# EAGLE board CT_schematic (EAGLE 7.6.0)

Size 100 x 80 mm. Coordinates in mm from the lower left corner, seen from the top.
Outline: 0,0 100,0 100,80 0,80 0,0
Copper layers (1*16): Top 0.035mm / dielectric 1.5mm / Bottom 0.035mm
Design rules "default": minimum track width 10mil, minimum drill 24mil, track to track 8mil, track to pad 8mil, pad to pad 8mil, via to via 8mil, smd to smd 8mil, copper to edge 40mil, drill to drill 8mil, minimum pad ring 10mil, minimum via ring 8mil, stop-mask expansion 4mil, vias tented up to drill 0mil, thermal gap 10mil

## Footprints (pad centres in the part's own frame; a part is rotated, then mirrored left to right if it is on the bottom)
C0603 = smd 0.8 x 0.8: 1 -0.762,0; 2 0.762,0
C0402 = smd 0.5 x 0.5: 1 -0.508,0; 2 0.508,0
C1206 = smd 1.3 x 1.6: 1 -1.524,0; 2 1.524,0
C0805 = smd 1.2 x 1.3: 1 -1.016,0; 2 1.016,0
C1210 = smd 1.2 x 2.5: 1 -1.524,0; 2 1.524,0
EXV-9H = smd 3.505 x 1.676: 1 -2.857,0; 2 2.857,0
PJ-037B_PACKAGE = drill 3.7 square: 1 12,0 | drill 3.2 square: 2 6,0
R0603 = smd 0.8 x 0.8: 1 -0.762,0; 2 0.762,0
LQFP64 = smd 0.3 x 1.2: 1 -3.75,-5.75; 2 -3.25,-5.75; 3 -2.75,-5.75; 4 -2.25,-5.75; 5 -1.75,-5.75; 6 -1.25,-5.75; 7 -0.75,-5.75; 8 -0.25,-5.75; 9 0.25,-5.75; 10 0.75,-5.75; 11 1.25,-5.75; 12 1.75,-5.75; 13 2.25,-5.75; 14 2.75,-5.75; 15 3.25,-5.75; 16 3.75,-5.75; 33 3.75,5.75; 34 3.25,5.75; 35 2.75,5.75; 36 2.25,5.75; 37 1.75,5.75; 38 1.25,5.75; 39 0.75,5.75; 40 0.25,5.75; 41 -0.25,5.75; 42 -0.75,5.75; 43 -1.25,5.75; 44 -1.75,5.75; 45 -2.25,5.75; 46 -2.75,5.75; 47 -3.25,5.75; 48 -3.75,5.75 | smd 1.2 x 0.3: 17 5.75,-3.75; 18 5.75,-3.25; 19 5.75,-2.75; 20 5.75,-2.25; 21 5.75,-1.75; 22 5.75,-1.25; 23 5.75,-0.75; 24 5.75,-0.25; 25 5.75,0.25; 26 5.75,0.75; 27 5.75,1.25; 28 5.75,1.75; 29 5.75,2.25; 30 5.75,2.75; 31 5.75,3.25; 32 5.75,3.75; 49 -5.75,3.75; 50 -5.75,3.25; 51 -5.75,2.75; 52 -5.75,2.25; 53 -5.75,1.75; 54 -5.75,1.25; 55 -5.75,0.75; 56 -5.75,0.25; 57 -5.75,-0.25; 58 -5.75,-0.75; 59 -5.75,-1.25; 60 -5.75,-1.75; 61 -5.75,-2.25; 62 -5.75,-2.75; 63 -5.75,-3.25; 64 -5.75,-3.75
SAMTEC_FTSH-105-01-L-DV-K = smd 0.762 x 2.794: 1 -2.54,-2.032; 2 -2.54,2.032; 3 -1.27,-2.032; 4 -1.27,2.032; 5 0,-2.032; 6 0,2.032; 7 1.27,-2.032; 8 1.27,2.032; 9 2.54,-2.032; 10 2.54,2.032
AT24C02D = smd 1.6 x 0.6: 1 -2.475,1.905 | smd 1.55 x 0.6: 2 -2.475,0.635; 3 -2.475,-0.635; 4 -2.475,-1.905; 5 2.475,-1.905; 6 2.475,-0.635; 7 2.475,0.635; 8 2.475,1.905
QFN-32 = smd 0.6 x 0.3: 1 -2.3,1.75; 2 -2.3,1.25; 3 -2.3,0.75; 4 -2.3,0.25; 5 -2.3,-0.25; 6 -2.3,-0.75; 7 -2.3,-1.25; 8 -2.3,-1.75; 17 2.3,-1.75; 18 2.3,-1.25; 19 2.3,-0.75; 20 2.3,-0.25; 21 2.3,0.25; 22 2.3,0.75; 23 2.3,1.25; 24 2.3,1.75 | smd 0.3 x 0.6: 9 -1.75,-2.3; 10 -1.25,-2.3; 11 -0.75,-2.3; 12 -0.25,-2.3; 13 0.25,-2.3; 14 0.75,-2.3; 15 1.25,-2.3; 16 1.75,-2.3; 25 1.75,2.3; 26 1.25,2.3; 27 0.75,2.3; 28 0.25,2.3; 29 -0.25,2.3; 30 -0.75,2.3; 31 -1.25,2.3; 32 -1.75,2.3 | smd 3.2 x 3.2: EXP 0,0
SJ-43515TS-SMT-TR = smd 2.2 x 3: 1 0.6,-7.4; 4 3.4,-7.4 | smd 3 x 3: 2 12.8,-7.4; 5 17,-3 | smd 2 x 3: 3 5.3,0; 6 2.5,0 | drill 1.8: P$7 4.5,-3.69; P$8 11.54,-3.69
WM-64PC = drill 0.6 pad 1: 1 -1,0.95; 2 -1,-0.95
ABLS-25.000MHZ-B2F-T = smd 5.6 x 2.8: 1 -3.81,0; 2 5.69,0
ASEK = smd 1.4 x 1: 1 -1.1,-0.8; 2 1.1,-0.8; 3 1.1,0.8; 4 -1.1,0.8
ASFL1 = smd 1.7 x 1.5: 1 -1.27,-1.1; 2 1.27,-1.1; 3 1.27,1.1; 4 -1.27,1.1
WSON-8 = smd 0.3 x 0.6: 1 -0.75,0; 2 0.05,0; 3 0.85,0; 4 1.65,0; 5 1.65,3.8; 6 0.85,3.8; 7 0.05,3.8; 8 -0.75,3.8 | smd 3 x 2.6: PAD 0.45,1.9
SON-6 = smd 0.55 x 0.3: 1 -0.355,0.5 | smd 0.52 x 0.3: 2 -0.37,0; 3 -0.37,-0.5; 4 0.37,-0.5; 5 0.37,0; 6 0.37,0.5
SW_4-1437565-2 = smd 1.4 x 2.1: 1 -2.23,4.55; 2 -2.23,-4.55; 3 2.23,4.55; 4 2.23,-4.55
LGM67K-G1J2-24-Z = smd 0.8 x 1.4: A -2,0; C 0,0
NC7SZ125M5X = smd 1.3 x 0.7: 1 -1.3,0.95; 2 -1.3,0; 3 -1.3,-0.95; 4 1.3,-0.95; 5 1.3,0.95

## Placement (x,y rotation side)
C1  1e-06  [C0603]  -33.02,77.47 0 top  (outside the outline)
C2  1e-07  [C0603]  -36.83,77.47 0 top  (outside the outline)
C3  1e-07  [C0603]  -40.64,77.47 0 top  (outside the outline)
C4  1e-07  [C0603]  -44.45,77.47 0 top  (outside the outline)
C5  1e-07  [C0603]  -48.26,77.47 0 top  (outside the outline)
C6  1e-07  [C0603]  -52.07,77.47 0 top  (outside the outline)
C7  4.7e-06  [C0603]  -29.21,77.47 0 top  (outside the outline)
C8  1e-08  [C0603]  -55.88,77.47 0 top  (outside the outline)
C9  1e-06  [C0603]  -59.69,77.47 0 top  (outside the outline)
C10  1e-07  [C0603]  -63.5,77.47 0 top  (outside the outline)
C11  1e-11  [C0402]  -80.01,82.55 0 top  (outside the outline)
C12  1e-11  [C0402]  -83.82,82.55 0 top  (outside the outline)
C13  1e-07  [C0402]  -15.24,87.63 0 top  (outside the outline)
C14  1e-08  [C0402]  -19.05,87.63 0 top  (outside the outline)
C15  1e-08  [C0402]  -22.86,87.63 0 top  (outside the outline)
C16  1e-06  [C0603]  -67.31,77.47 0 top  (outside the outline)
C17  1e-06  [C0603]  -71.12,77.47 0 top  (outside the outline)
C18  1e-06  [C0603]  -74.93,77.47 0 top  (outside the outline)
C19  1e-06  [C0603]  -78.74,77.47 0 top  (outside the outline)
C20  1e-06  [C0603]  -82.55,77.47 0 top  (outside the outline)
C21  1e-06  [C0603]  -15.24,82.55 0 top  (outside the outline)
C22  1e-06  [C0603]  -19.05,82.55 0 top  (outside the outline)
C23  1e-07  [C0402]  -26.67,87.63 0 top  (outside the outline)
C24  1e-07  [C0402]  -30.48,87.63 0 top  (outside the outline)
C25  1e-07  [C0402]  -34.29,87.63 0 top  (outside the outline)
C26  1e-07  [C0402]  -38.1,87.63 0 top  (outside the outline)
C27  1e-06  [C0603]  -22.86,82.55 0 top  (outside the outline)
C28  1e-08  [C0402]  -41.91,87.63 0 top  (outside the outline)
C29  1e-08  [C0402]  -45.72,87.63 0 top  (outside the outline)
C30  1e-08  [C0402]  -49.53,87.63 0 top  (outside the outline)
C31  1e-05  [C1206]  -55.88,64.77 0 top  (outside the outline)
C32  1e-05  [C0805]  -80.01,64.77 0 top  (outside the outline)
C33  1e-08  [C0402]  -53.34,87.63 0 top  (outside the outline)
C34  1e-05  [C1206]  -62.23,64.77 0 top  (outside the outline)
C35  1e-05  [C1210]  -49.53,64.77 0 top  (outside the outline)
C36  1e-07  [C0402]  -57.15,87.63 0 top  (outside the outline)
C37  0.0001  [EXV-9H]  -57.15,55.88 0 top  (outside the outline)
C38  0.0001  [EXV-9H]  -68.58,55.88 0 top  (outside the outline)
C39  1e-08  [C0402]  -60.96,87.63 0 top  (outside the outline)
C40  1e-08  [C0402]  -64.77,87.63 0 top  (outside the outline)
J1  PJ-037B  [PJ-037B_PACKAGE]  -83.82,21.59 0 top  (outside the outline)
R2  1000.0  [R0603]  -26.67,82.55 0 top  (outside the outline)
R4  4700.0  [R0603]  -30.48,82.55 0 top  (outside the outline)
R5  2200.0  [R0603]  -34.29,82.55 0 top  (outside the outline)
R6  2200.0  [R0603]  -38.1,82.55 0 top  (outside the outline)
R7  2200.0  [R0603]  -41.91,82.55 0 top  (outside the outline)
R8  2200.0  [R0603]  -45.72,82.55 0 top  (outside the outline)
R9  10000.0  [R0603]  -30.48,72.39 0 top  (outside the outline)
R10  10000.0  [R0603]  -35.56,72.39 0 top  (outside the outline)
R11  10000.0  [R0603]  -40.64,72.39 0 top  (outside the outline)
R12  10000.0  [R0603]  -45.72,72.39 0 top  (outside the outline)
R13  5.0  [R0603]  -49.53,82.55 0 top  (outside the outline)
R14  10000.0  [R0603]  -50.8,72.39 0 top  (outside the outline)
R15  10000.0  [R0603]  -55.88,72.39 0 top  (outside the outline)
R16  10000.0  [R0603]  -60.96,72.39 0 top  (outside the outline)
R17  10000.0  [R0603]  -66.04,72.39 0 top  (outside the outline)
R18  10000.0  [R0603]  -71.12,72.39 0 top  (outside the outline)
R19  10000.0  [R0603]  -76.2,72.39 0 top  (outside the outline)
R20  10000.0  [R0603]  -81.28,72.39 0 top  (outside the outline)
R21  10000.0  [R0603]  -15.24,77.47 0 top  (outside the outline)
R22  1270.0  [R0603]  -53.34,82.55 0 top  (outside the outline)
R23  1270.0  [R0603]  -57.15,82.55 0 top  (outside the outline)
R24  100000.0  [R0603]  -85.09,63.5 0 top  (outside the outline)
R25  200.0  [R0603]  -60.96,82.55 0 top  (outside the outline)
R26  1000.0  [R0603]  -64.77,82.55 0 top  (outside the outline)
R27  100000.0  [R0603]  -15.24,72.39 0 top  (outside the outline)
R28  2231.0  [R0603]  -68.58,82.55 0 top  (outside the outline)
R29  1000.0  [R0603]  -72.39,82.55 0 top  (outside the outline)
R30  10000.0  [R0603]  -20.32,77.47 0 top  (outside the outline)
R31  10000.0  [R0603]  -25.4,77.47 0 top  (outside the outline)
R32  9100.0  [R0603]  -76.2,82.55 0 top  (outside the outline)
R33  680000.0  [R0603]  -20.32,72.39 0 top  (outside the outline)
R34  120000.0  [R0603]  -25.4,72.39 0 top  (outside the outline)
U1  STM32L433RCT6  [LQFP64]  -24.13,35.56 0 top  (outside the outline)
U2  FTSH-105-01-L-DV-K  [SAMTEC_FTSH-105-01-L-DV-K]  -35.56,7.62 0 top  (outside the outline)
U3  AT24C02D-SSHM-T  [AT24C02D]  -25.4,46.99 0 top  (outside the outline)
U4  AT24C02D-SSHM-T  [AT24C02D]  -41.91,46.99 0 top  (outside the outline)
U5  SGTL5000XNAA3  [QFN-32]  -71.12,34.29 0 top  (outside the outline)
U6  SJ-43515TS-SMT-TR  [SJ-43515TS-SMT-TR]  -68.58,10.16 0 top  (outside the outline)
U7  SJ-43515TS-SMT-TR  [SJ-43515TS-SMT-TR]  -39.37,24.13 0 top  (outside the outline)
U8  SJ-43515TS-SMT-TR  [SJ-43515TS-SMT-TR]  -67.31,24.13 0 top  (outside the outline)
U9  WM-64PCT  [WM-64PC]  -57.15,34.29 0 top  (outside the outline)
U10  ABLS-25.000MHZ-B2F-T  [ABLS-25.000MHZ-B2F-T]  -26.67,66.04 0 top  (outside the outline)
U11  ASEK-32.768KHz-ECST  [ASEK]  -48.26,55.88 0 top  (outside the outline)
U12  ASFL-24.57MHZ-NCS  [ASFL1]  -27.94,57.15 0 top  (outside the outline)
U13  LP3878SDX-ADJ/NOPB  [WSON-8]  -63.5,45.72 0 top  (outside the outline)
U14  LP3878SDX-ADJ/NOPB  [WSON-8]  -83.82,45.72 0 top  (outside the outline)
U15  TPS3895ADRYR  [SON-6]  -67.31,86.36 0 top  (outside the outline)
U16  4-1437565-2  [SW_4-1437565-2]  -45.72,35.56 0 top  (outside the outline)
U17  Q65110A2395  [LGM67K-G1J2-24-Z]  -38.1,64.77 0 top  (outside the outline)
U18  nc7sz125m5x  [NC7SZ125M5X]  -67.31,63.5 0 top  (outside the outline)
U19  nc7sz125m5x  [NC7SZ125M5X]  -73.66,63.5 0 top  (outside the outline)

## Library data of the parts
C1-C40 J1 R2 R4-R34 U1-U19 = circuit_tree

## Nets
CLK_CRYSTAL_U1_5: C11.1 U1.5 U10.1
CLK_CRYSTAL_U1_6: C12.1 U1.6 U10.2
CLK_U1_3: U1.3 U11.3
CLK_U5_21: U5.21 U12.3
GND: C1.2 C2.2 C3.2 C4.2 C5.2 C6.2 C7.2 C8.2 C9.2 C10.2 C11.2 C12.2 C13.2 C14.2 C15.2 C23.2 C24.2 C25.2 C26.2 C27.2 C28.2 C29.2 C30.2 C31.2 C32.2 C33.2 C34.2 C35.2 C36.2 C37.2 C38.2 C39.2 C40.2 J1.2 R2.2 R9.2 R13.2 R14.2 R16.2 R17.2 R18.2 R20.2 R21.2 R23.2 R26.2 R29.2 R32.2 R34.2 U1.12 U1.18 U1.31 U1.47 U1.63 U2.3 U2.5 U3.4 U4.4 U5.1 U5.3 U5.7 U5.EXP U7.1 U8.1 U9.2 U11.2 U12.2 U13.3 U13.PAD U14.3 U14.PAD U15.2 U17.C U18.2 U18.3 U19.1 U19.3
NET_U1_7: R4.1 U1.7 U19.4
NET_U1_29: R7.1 U1.29 U4.6
NET_U1_30: R8.1 U1.30 U4.5
NET_U1_42: R5.1 U1.42 U3.6
NET_U1_43: R6.1 U1.43 U3.5
NET_U1_60: R9.1 U1.60
NET_U1_61: U17.A
NET_U1_62: U16.3 U16.4
NET_U2_9: R13.1 U2.9
NET_U3_1: R15.1 U3.1
NET_U3_2: R16.1 U3.2
NET_U3_3: R17.1 U3.3
NET_U3_7: R14.1 U3.7
NET_U4_1: R19.1 U4.1
NET_U4_2: R20.1 U4.2
NET_U4_3: R21.1 U4.3
NET_U4_7: R18.1 U4.7
NET_U5_10: C26.1 U5.10
NET_U5_29: R22.1 U5.29
NET_U5_31: R23.1 U5.31
NET_U6_1: U5.4 U6.1
NET_U6_2: U5.2 U6.2
NET_U6_5: U5.6 U6.5
NET_U7_2: C17.1 U7.2
NET_U7_5: C16.1 U7.5
NET_U7_11: C17.2
NET_U7_12: C16.2
NET_U8_2: C19.1 C20.1 U8.2
NET_U8_5: C18.1 U8.5
NET_U8_13: C19.2 C20.2
NET_U8_14: C18.2
NET_U9_1: C21.1 C22.1 C27.1 U5.16 U9.1
NET_U9_15: C21.2 C22.2
NET_U13_1: C30.1 U13.1
NET_U13_6: R25.2 R26.1 U13.6
NET_U13_8: R24.1 U13.8
NET_U14_1: C33.1 U14.1
NET_U14_6: R28.2 R29.1 U14.6
NET_U14_8: R27.1 U14.8
NET_U15_1: R31.1 R32.1 U15.1
NET_U15_3: R33.2 R34.1 U15.3
NET_U15_4: R30.1 U15.4 U18.4 U19.2
NET_U16_1: R2.1 U16.1 U16.2
PROC_SAI1_FS_A: U1.33 U5.23
PROC_SAI1_SCK_A: U1.34 U5.24
PROC_SAI1_SD_A: U1.11 U5.26
PROC_SYS_JTCK_SWCLK: R11.1 U1.49 U2.4
PROC_SYS_JTDO_SWO: U1.55 U2.6
PROC_SYS_JTMS_SWDIO: R12.1 U1.46 U2.2
RST_OUT_U2_JTAG_RST_B: R10.1 U2.10 U18.1
VCC_S1_10V8: C31.1 C34.1 C37.1 C38.1 J1.1 R24.2 R27.2 U13.4 U14.4
VCC_TIER1_1V2: C23.1 C32.1 R25.1 U5.30 U13.5
VCC_TIER1_3V3: C1.1 C2.1 C3.1 C4.1 C5.1 C6.1 C7.1 C8.1 C9.1 C10.1 C13.1 C14.1 C15.1 C24.1 C25.1 C28.1 C29.1 C35.1 C36.1 C39.1 C40.1 R4.2 R5.2 R6.2 R7.2 R8.2 R10.2 R11.2 R12.2 R15.2 R19.2 R22.2 R28.1 R30.2 R31.2 R33.1 U1.1 U1.13 U1.19 U1.32 U1.48 U1.64 U2.1 U3.8 U4.8 U5.5 U5.20 U11.4 U12.4 U14.5 U15.6 U18.5 U19.5

## Tracks (layer width: path | path; a pad name or v marks a point on that pad's centre or on a via)
CLK_CRYSTAL_U1_5  (2 unrouted)
CLK_CRYSTAL_U1_6  (2 unrouted)
CLK_U1_3  (1 unrouted)
CLK_U5_21  (1 unrouted)
GND  (75 unrouted)
NET_U1_7  (2 unrouted)
NET_U1_29  (2 unrouted)
NET_U1_30  (2 unrouted)
NET_U1_42  (2 unrouted)
NET_U1_43  (2 unrouted)
NET_U1_60  (1 unrouted)
NET_U1_62  (1 unrouted)
NET_U2_9  (1 unrouted)
NET_U3_1  (1 unrouted)
NET_U3_2  (1 unrouted)
NET_U3_3  (1 unrouted)
NET_U3_7  (1 unrouted)
NET_U4_1  (1 unrouted)
NET_U4_2  (1 unrouted)
NET_U4_3  (1 unrouted)
NET_U4_7  (1 unrouted)
NET_U5_10  (1 unrouted)
NET_U5_29  (1 unrouted)
NET_U5_31  (1 unrouted)
NET_U6_1  (1 unrouted)
NET_U6_2  (1 unrouted)
NET_U6_5  (1 unrouted)
NET_U7_2  (1 unrouted)
NET_U7_5  (1 unrouted)
NET_U8_2  (2 unrouted)
NET_U8_5  (1 unrouted)
NET_U8_13  (1 unrouted)
NET_U9_1  (4 unrouted)
NET_U9_15  (1 unrouted)
NET_U13_1  (1 unrouted)
NET_U13_6  (2 unrouted)
NET_U13_8  (1 unrouted)
NET_U14_1  (1 unrouted)
NET_U14_6  (2 unrouted)
NET_U14_8  (1 unrouted)
NET_U15_1  (2 unrouted)
NET_U15_3  (2 unrouted)
NET_U15_4  (3 unrouted)
NET_U16_1  (2 unrouted)
PROC_SAI1_FS_A  (1 unrouted)
PROC_SAI1_SCK_A  (1 unrouted)
PROC_SAI1_SD_A  (1 unrouted)
PROC_SYS_JTCK_SWCLK  (2 unrouted)
PROC_SYS_JTDO_SWO  (1 unrouted)
PROC_SYS_JTMS_SWDIO  (2 unrouted)
RST_OUT_U2_JTAG_RST_B  (2 unrouted)
VCC_S1_10V8  (8 unrouted)
VCC_TIER1_1V2  (4 unrouted)
VCC_TIER1_3V3  (52 unrouted)